# Altium PCB BaseArduino.PcbDoc
Units mm, origin at the board's own origin, x right, y up, seen from the top; angles counter-clockwise.
Board outline 68.58 x 53.34 mm, 2 copper layers (Top Layer, Bottom Layer); 21 components, 19 nets, 72 pads, 10 vias.
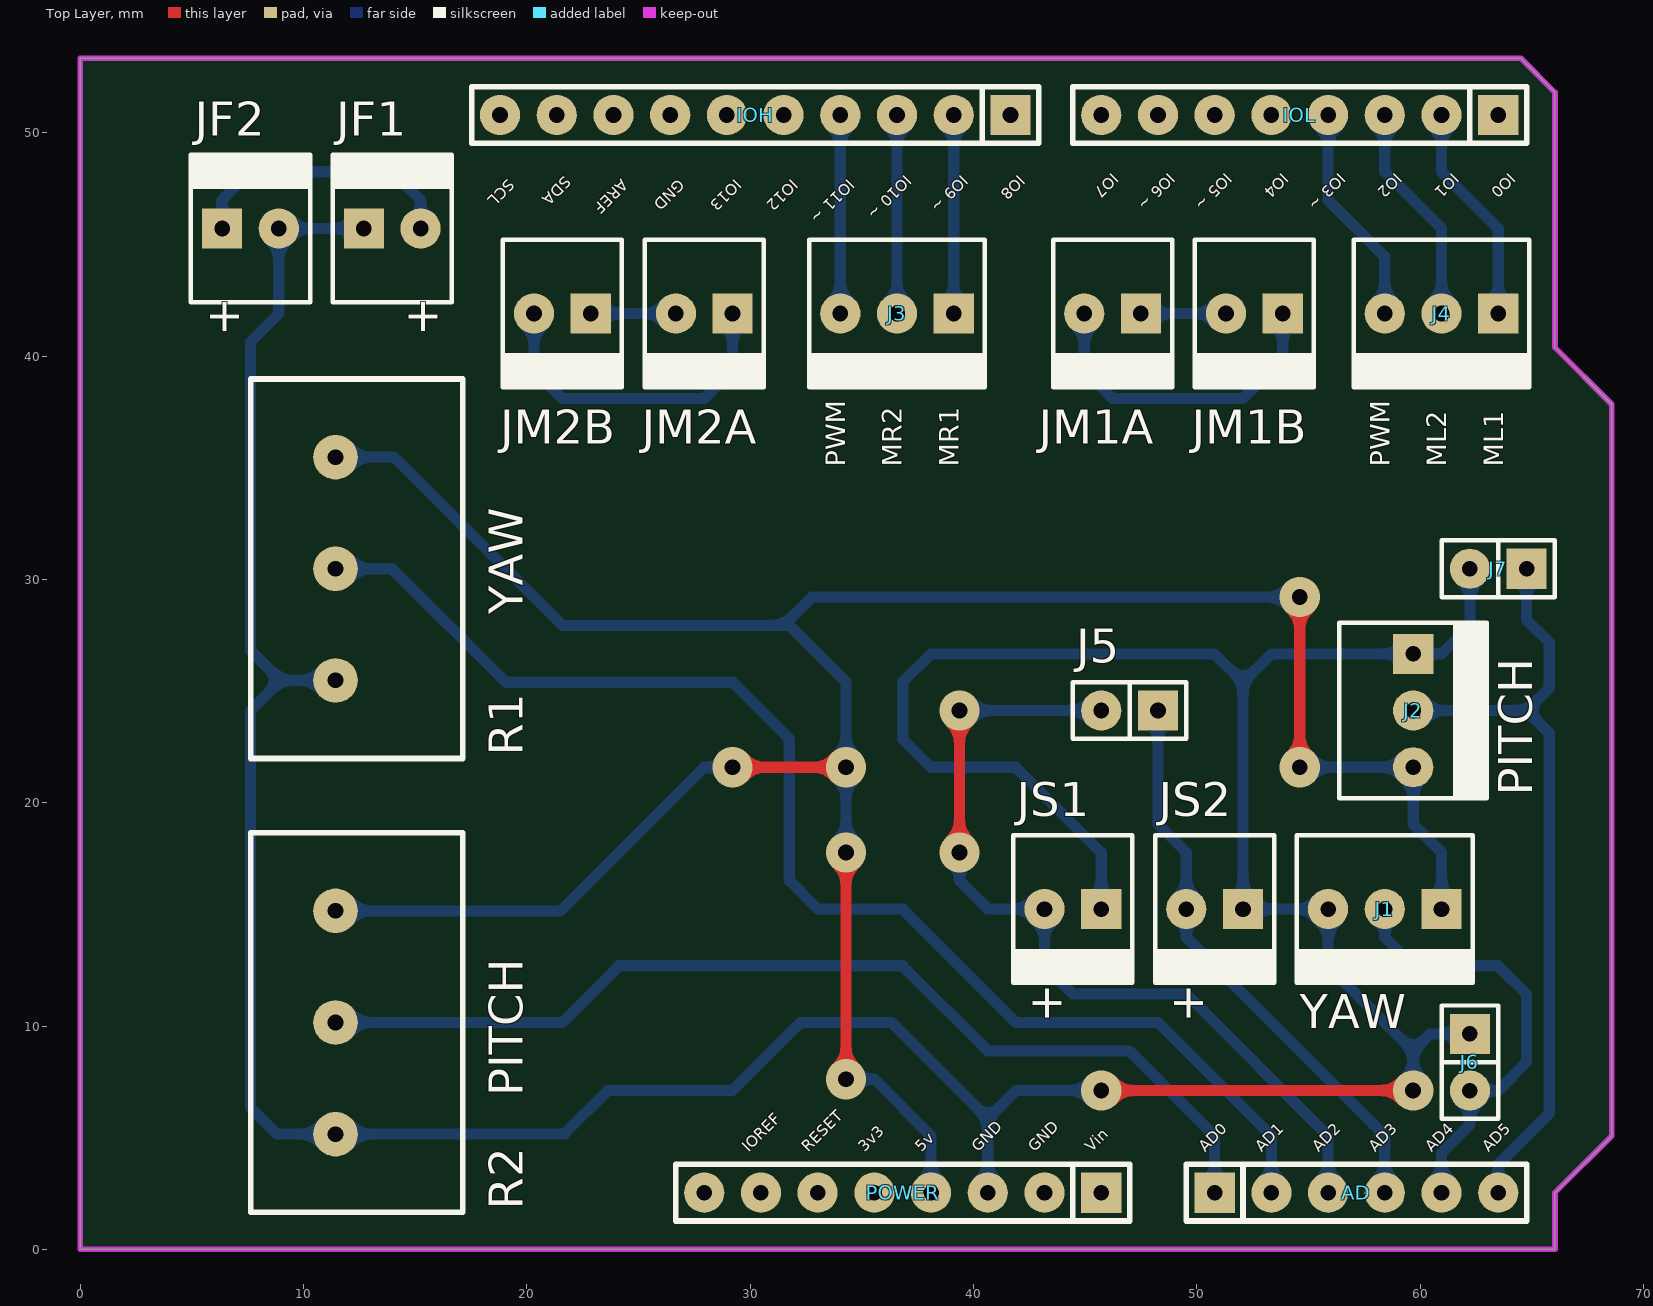
[diagram p0: Top Layer view]
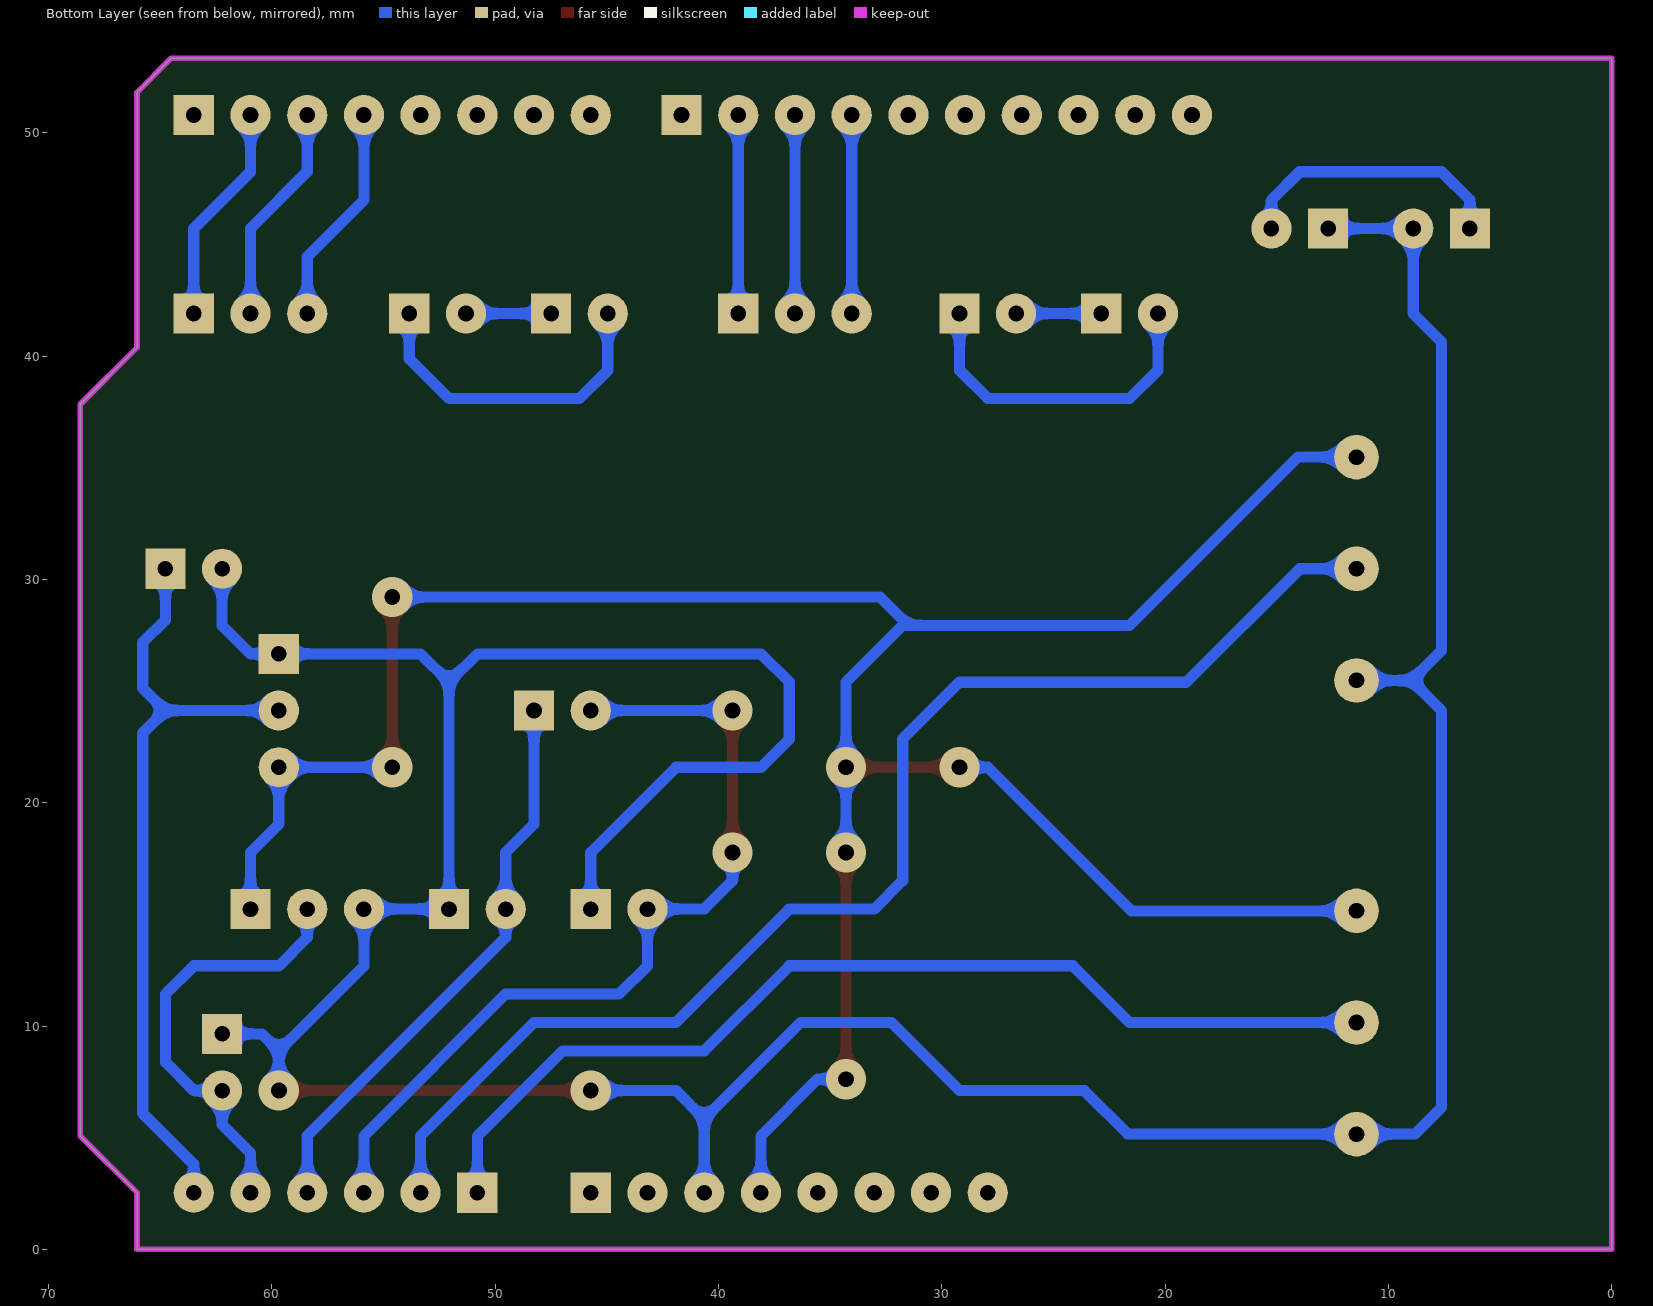
[diagram p1: Bottom Layer view, seen from below]
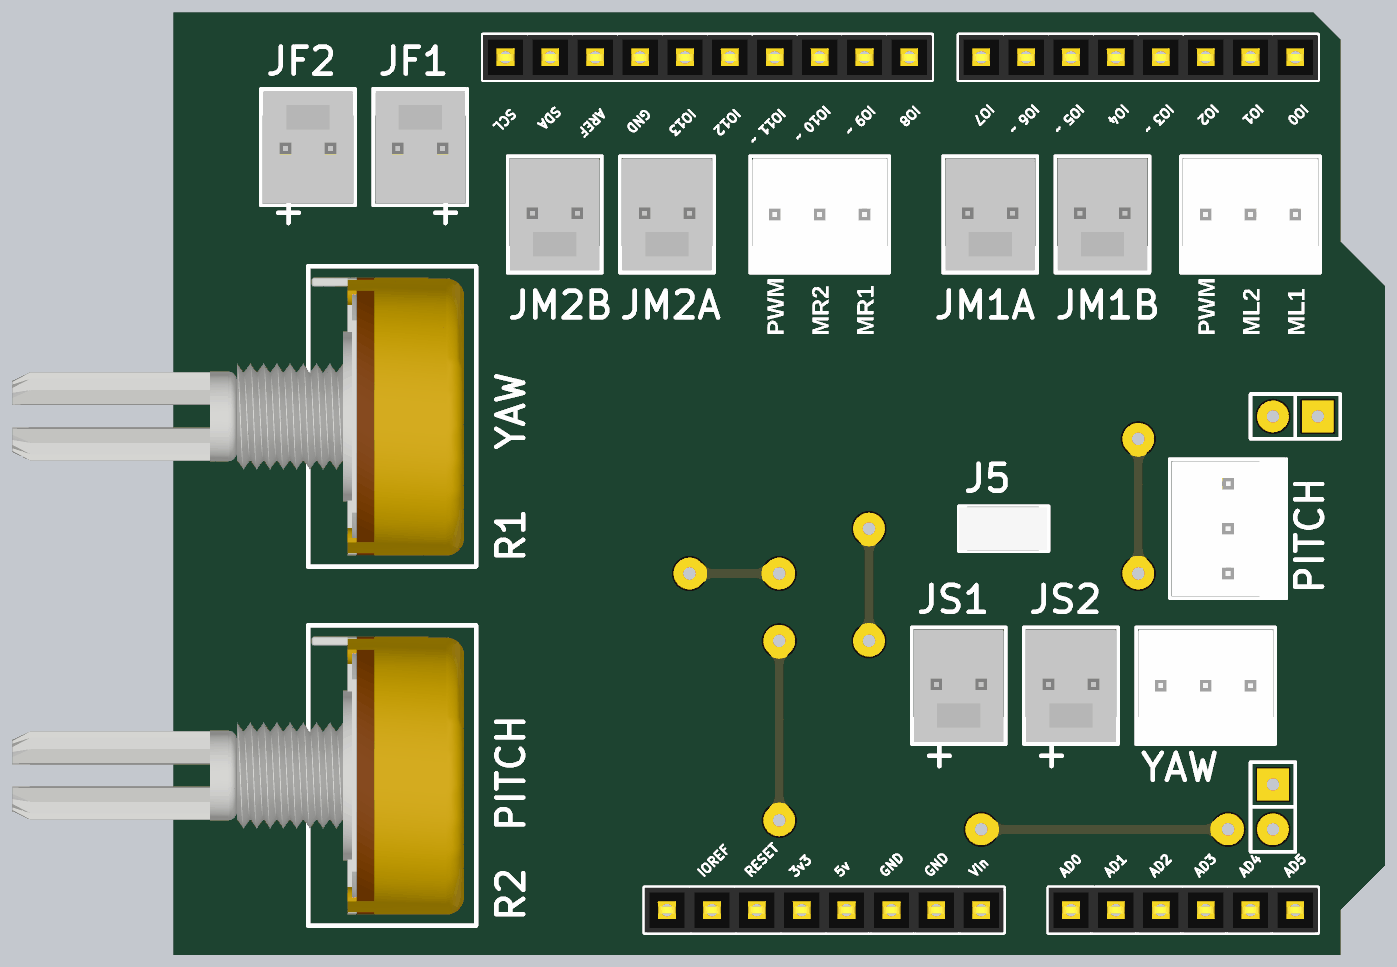
[diagram p2: 3D render of the assembled board from above, using the file's embedded part models]

## Layer stack, top to bottom
Top Solder: solder mask 0.0102, Solder Resist, Dk 3.5
Top Layer: signal copper 0.0356
Dielectric 1: dielectric 0.32, FR-4, Dk 4.8
Bottom Layer: signal copper 0.0356
Bottom Solder: solder mask 0.0102, Solder Resist, Dk 3.5

## Board outline
0,0 0,53.34 64.516,53.34 66.04,51.816 66.04,40.386 68.58,37.846 68.58,5.08 66.04,2.54 66.04,0

## Design rules (kind name [scope] priority, off if disabled: settings)
Clearance [All] p1: gap=0.4 ignorepadtopadclearanceinfootprint=FALSE
PolygonConnect [All] p1: connectstyle=Relief reliefconductorwidth=0.254 reliefentries=4 polygonreliefangle="90 Angle" airgapwidth=0.254
RoutingVias [All] p1: holewidth=0.711 width=1.8 viastyle="Through Hole" minholewidth=0.711 minwidth=1.8 maxholewidth=0.711 maxwidth=1.8
SolderMaskExpansion [All] p1: expansion=0.102
Width [All] p1: maxlimit=0.5 minlimit=0.5 preferedwidth=0.5
30 further rules are at their usual default settings.

## Components (designator, comment, footprint, x,y, rotation, side; value= is the part's Value field where it differs from the comment)
AD "AD" "Header 6x1 8.5mm" 50.8,2.54 r0 top
IOH "IOH" "Header 10x1 8.5mm" 41.656,50.8 r180 top
IOL "IOL" "Header 8x1 8.5mm" 63.5,50.8 r180 top
J1 "YAW" MOLEX3 60.96,15.24 r180 top
J2 "PITCH" MOLEX3 59.69,26.67 r270 top
J3 "M1_CONT" MOLEX3 39.116,41.91 r180 top
J4 "M2_CONT" MOLEX3 63.5,41.91 r180 top
J5 "JUMPER" JUMPER2 46.99,24.13 r180 top
J6 "YAW_MED" SIP2 62.23,8.382 r270 top
J7 "PITCH_MED" SIP2 63.5,30.48 r180 top
JF1 "FUENTE_IN" MOLEX2 12.7,45.72 r0 top
JF2 "FUENTE_OUT" MOLEX2 6.35,45.72 r0 top
JM1A "M1_IN" MOLEX2 47.498,41.91 r180 top
JM1B "M1_OUT" MOLEX2 53.848,41.91 r180 top
JM2A "M2_IN" MOLEX2 29.21,41.91 r180 top
JM2B "M2_OUT" MOLEX2 22.86,41.91 r180 top
JS1 "SIGNAL 1" MOLEX2 45.72,15.24 r180 top
JS2 "SIGNAL 2" MOLEX2 52.07,15.24 r180 top
POWER "POWER_UNO" "Header 8x1 8.5mm" 45.72,2.54 r180 top
R1 "YAW" POTENCIOMETRO 11.43,30.48 r270 top
R2 "PITCH" POTENCIOMETRO 11.43,10.16 r270 top

## Footprints (in the part's own frame and the unit in brackets; to place one, negate y for a bottom-side part, rotate by r counter-clockwise, add the part's x,y. Pads: shape width x height; smd on the part's side, far side on the other; paste and mask are expansions set on the pad)
"Header 6x1 8.5mm" [mm] "Stackable 6 pin header"
  rect 1.8x1.8 hole 0.7: 1(0,0)
  round 1.8 hole 0.7: 2(2.54,0) 3(5.08,0) 4(7.62,0) 5(10.16,0) 6(12.7,0)
  silkscreen extent -1.27,-1.27 13.97,1.27, body extent -1.27,-1.27 13.97,1.27, height 8.5
"Header 8x1 8.5mm" [mm] "Stackable 8 pin header"
  rect 1.8x1.8 hole 0.7: 1(0,0)
  round 1.8 hole 0.7: 2(2.54,0) 3(5.08,0) 4(7.62,0) 5(10.16,0) 6(12.7,0) 7(15.24,0) 8(17.78,0)
  silkscreen extent -1.27,-1.27 19.05,1.27, body extent -1.27,-1.27 19.05,1.27, height 8.5
"Header 10x1 8.5mm" [mm] "Stackable 10 pin header"
  rect 1.8x1.8 hole 0.7: 1(0,0)
  round 1.8 hole 0.7: 2(2.54,0) 3(5.08,0) 4(7.62,0) 5(10.16,0) 6(12.7,0) 7(15.24,0) 8(17.78,0) 9(20.32,0) 10(22.86,0)
  silkscreen extent -1.27,-1.27 24.13,1.27, body extent -1.27,-1.27 24.13,1.27, height 8.5
JUMPER2 [mm]
  rect 1.8x1.8 hole 0.7: 1(-1.27,0)
  round 1.8 hole 0.7: 2(1.27,0)
  silkscreen extent -2.54,-1.27 2.54,1.27, body extent -2.46,-1.27 2.54,1.27, height 9.5
MOLEX2 [mm]
  rect 1.8x1.8 hole 0.7: 1(0,0)
  round 1.8 hole 0.7: 2(2.54,0)
  silkscreen extent -1.4,-3.3 3.94,3.3, body extent -1.27,-3.17 3.81,3.17, height 10.74
MOLEX3 [mm]
  rect 1.8x1.8 hole 0.7: 1(0,0)
  round 1.8 hole 0.7: 2(2.54,0) 3(5.08,0)
  silkscreen extent -1.4,-3.3 6.48,3.3, body extent -1.27,-3.17 6.35,3.18, height 10.74
POTENCIOMETRO [mm]
  round 2 hole 0.7: 1(-5,0) 2(0,0) 3(5,0)
  silkscreen extent -8.5,-3.8 8.5,5.7, body extent -7.87,-20.53 7.87,5.03, height 20.12
SIP2 [mm]
  rect 1.8x1.8 hole 0.7: 1(-1.27,0)
  round 1.8 hole 0.7: 2(1.27,0)
  silkscreen extent -2.54,-1.27 2.54,1.27

## Part data
J1 J2 J3 J4: library part MOLEX3
J6 J7: library part CON2
JF1 JF2 JM1A JM1B JM2A JM2B JS1 JS2: library part MOLEX2
R1 R2: library part POTENCIOMETRO

## Via types
v1: diameter 1.8, hole 0.711, Top Layer to Bottom Layer, 10 vias

## Nets (pads, with @x,y where several pads share a name; then routed paths per layer and width w, separated by ;. In a path a pad name is that pad's centre, name@x,y a point inside that pad or via, vN(x,y) a via of type N, cw(c..) or ccw(c..) an arc to the next point about the centre after c; other vN are vias at no path point)
5V: J1.1 J2.3 POWER.4 R1.1 R2.1 | length 121
  Top Layer w0.5: v1(29.21,21.59) v1(34.29,21.59) ; v1(34.29,7.62) v1(34.29,17.78) ; v1(54.61,21.59) v1(54.61,29.21)
  Bottom Layer w0.5: R2.1 21.51,15.16 27.94,21.59 v1(29.21,21.59) ; R1.1 14.05,35.48 21.59,27.94 31.496,27.94 ; v1(34.29,7.62) 35.56,7.62 38.1,5.08 POWER.4 ; v1(34.29,17.78) v1(34.29,21.59) 34.29,25.4 31.75,27.94 31.496,27.94 ; v1(54.61,21.59) J2.3 59.69,19.05 60.96,17.78 J1.1 ; v1(54.61,29.21) 32.766,29.21 31.496,27.94
6V_EXT: JF1.2 JF2.1 | length 12.5
  Bottom Layer w0.5: JF2.1 6.35,46.99 7.62,48.26 13.97,48.26 15.24,46.99 JF1.2
GND: J1.3 J2.1 J6.1 J7.2 JF1.1 JF2.2 JS1.1 JS2.1 POWER.3 R1.3 R2.3 | length 180.2
  Top Layer w0.5: v1(45.72,7.112) v1(59.69,7.112)
  Bottom Layer w0.5: R1.3 8.97,25.48 ; JF1.1 JF2.2 8.89,41.91 7.62,40.64 7.62,26.83 8.97,25.48 ; POWER.3 40.64,5.842 ; v1(45.72,7.112) 41.91,7.112 40.64,5.842 ; JS1.1 45.72,17.78 41.91,21.59 38.1,21.59 36.83,22.86 36.83,25.4 38.1,26.67 50.8,26.67 52.07,25.4 ; v1(59.69,7.112) 59.69,8.89 ; J6.1 60.452,9.652 59.69,8.89 ; J7.2 62.23,27.94 60.96,26.67 J2.1 53.34,26.67 52.07,25.4 ; 8.97,25.48 7.62,24.13 7.62,6.35 8.81,5.16 R2.3 21.67,5.16 23.622,7.112 29.21,7.112 32.258,10.16 36.322,10.16 40.64,5.842 ; 52.07,25.4 JS2.1 J1.3 55.88,12.7 59.69,8.89
ML1: IOL.2 J4.1 | length 9.9
  Bottom Layer w0.5: IOL.2 60.96,48.26 63.5,45.72 J4.1
ML2: IOL.3 J4.2 | length 9.9
  Bottom Layer w0.5: IOL.3 58.42,48.26 60.96,45.72 J4.2
ML_PWM: IOL.4 J4.3 | length 9.9
  Bottom Layer w0.5: IOL.4 55.88,46.99 58.42,44.45 J4.3
MR1: IOH.2 J3.1 | length 8.9
  Bottom Layer w0.5: J3.1 IOH.2
MR2: IOH.3 J3.2 | length 8.9
  Bottom Layer w0.5: J3.2 IOH.3
MR_PWM: IOH.4 J3.3 | length 8.9
  Bottom Layer w0.5: J3.3 IOH.4
NetJM1A_1: JM1A.1 JM1B.2 | length 3.8
  Bottom Layer w0.5: JM1A.1 JM1B.2
NetJM1A_2: JM1A.2 JM1B.1 | length 14.7
  Bottom Layer w0.5: JM1A.2 44.958,39.37 46.228,38.1 52.07,38.1 53.848,39.878 JM1B.1
NetJM2A_1: JM2A.1 JM2B.2 | length 15
  Bottom Layer w0.5: JM2B.2 20.32,39.37 21.59,38.1 27.94,38.1 29.21,39.37 JM2A.1
NetJM2A_2: JM2A.2 JM2B.1 | length 3.8
  Bottom Layer w0.5: JM2B.1 JM2A.2
P1_Yaw: AD.2 R1.2 | length 58.7
  Bottom Layer w0.5: R1.2 13.97,30.48 19.05,25.4 29.21,25.4 31.75,22.86 31.75,16.51 33.02,15.24 36.83,15.24 41.91,10.16 48.26,10.16 53.34,5.08 AD.2
P2_Pitch: AD.1 R2.2 | length 46.1
  Bottom Layer w0.5: R2.2 21.59,10.16 24.13,12.7 36.83,12.7 40.64,8.89 46.99,8.89 50.8,5.08 AD.1
Pitch: AD.6 J2.2 J7.1 | length 35.2
  Bottom Layer w0.5: J2.2 64.77,24.13 ; AD.6 63.5,3.81 65.786,6.096 65.786,23.114 64.77,24.13 ; J7.1 64.77,28.194 65.786,27.178 65.786,25.146 64.77,24.13
SignalPitch: AD.4 J5.1 JS2.2 | length 25.8
  Bottom Layer w0.5: J5.1 48.26,19.05 49.53,17.78 JS2.2 49.53,13.97 58.42,5.08 AD.4
SignalYaw: AD.3 J5.2 JS1.2 | length 39.2
  Top Layer w0.5: v1(39.37,17.78) v1(39.37,24.13)
  Bottom Layer w0.5: v1(39.37,17.78) 39.37,16.51 40.64,15.24 JS1.2 43.18,12.7 44.45,11.43 49.53,11.43 55.88,5.08 AD.3 ; v1(39.37,24.13) J5.2
Yaw: AD.5 J1.2 J6.2 | length 19.9
  Bottom Layer w0.5: J1.2 58.42,13.97 59.69,12.7 63.5,12.7 64.77,11.43 64.77,8.382 63.5,7.112 J6.2 62.23,5.588 60.96,4.318 AD.5
pads on no net: IOH.1 IOH.5 IOH.6 IOH.7 IOH.8 IOH.9 IOH.10 IOL.1 IOL.5 IOL.6 IOL.7 IOL.8 POWER.1 POWER.2 POWER.5 POWER.6 POWER.7 POWER.8

## Keep-outs
Keep-Out Layer:
  the board outline again, w0.254

## Silkscreen, mask and mechanical layers (free items; w line width, h text height)
Top Overlay:
  text "IO7" at 46.189,48.232 h0.51 r225
  text "IO6 ~" at 48.729,48.232 h0.51 r225
  text "IO5 ~" at 51.269,48.232 h0.51 r225
  text "IO4" at 53.809,48.232 h0.51 r225
  text "IO3 ~" at 56.349,48.232 h0.51 r225
  text "IO2" at 58.889,48.232 h0.51 r225
  text "IO1" at 61.429,48.232 h0.51 r225
  text "IO0" at 63.969,48.232 h0.51 r225
  text "IO10 ~" at 36.918,48.158 h0.51 r225
  text "IO9 ~" at 39.458,48.158 h0.51 r225
  text "IO8" at 41.998,48.158 h0.51 r225
  text "SDA" at 21.678,48.105 h0.51 r225
  text "SCL" at 19.138,47.978 h0.51 r225
  text "AREF" at 24.218,47.978 h0.51 r225
  text "GND" at 26.758,47.978 h0.51 r225
  text "IO13" at 29.298,47.978 h0.51 r225
  text "IO12" at 31.838,47.978 h0.51 r225
  text "IO11 ~" at 34.378,47.978 h0.51 r225
  text "+" at 7.112,40.894 h1.52 r90
  text "+" at 16.002,40.894 h1.52 r90
  text "PWM" at 34.544,35.052 h1.52 r90
  text "MR2" at 37.084,35.052 h1.52 r90
  text "MR1" at 39.624,35.052 h1.52 r90
  text "PWM" at 58.928,35.052 h1.52 r90
  text "ML2" at 61.468,35.052 h1.52 r90
  text "ML1" at 64.008,35.052 h1.52 r90
  text "YAW" at 19.812,28.448 h1.52 r90
  text "+" at 43.942,10.16 h1.52 r90
  text "+" at 50.292,10.16 h1.52 r90
  text "PITCH" at 19.812,6.858 h1.52 r90
  text "IOREF" at 29.925,4.332 h0.51 r45
  text "RESET" at 32.592,4.332 h0.51 r45
  text "3v3" at 35.132,4.332 h0.51 r45
  text "5v" at 37.672,4.332 h0.51 r45
  text "GND" at 40.212,4.332 h0.51 r45
  text "GND" at 42.752,4.332 h0.51 r45
  text "Vin" at 45.292,4.332 h0.51 r45
  text "AD0" at 50.372,4.332 h0.51 r45
  text "AD1" at 52.912,4.332 h0.51 r45
  text "AD2" at 55.452,4.332 h0.51 r45
  text "AD3" at 57.992,4.332 h0.51 r45
  text "AD4" at 60.532,4.332 h0.51 r45
  text "AD5" at 63.072,4.332 h0.51 r45